# Altium PCB HU_MAIN_PCB_revA.PcbDoc (part 3 of 3)
Units mm, origin at the board's own origin, x right, y up, seen from the top; angles counter-clockwise.
Board outline 136.5 x 85 mm, 4 copper layers (Top Layer, Layer 1, Layer 2, Bottom Layer), stack 1.586 mm thick; 169 components, 126 nets, 634 pads, 1057 vias.
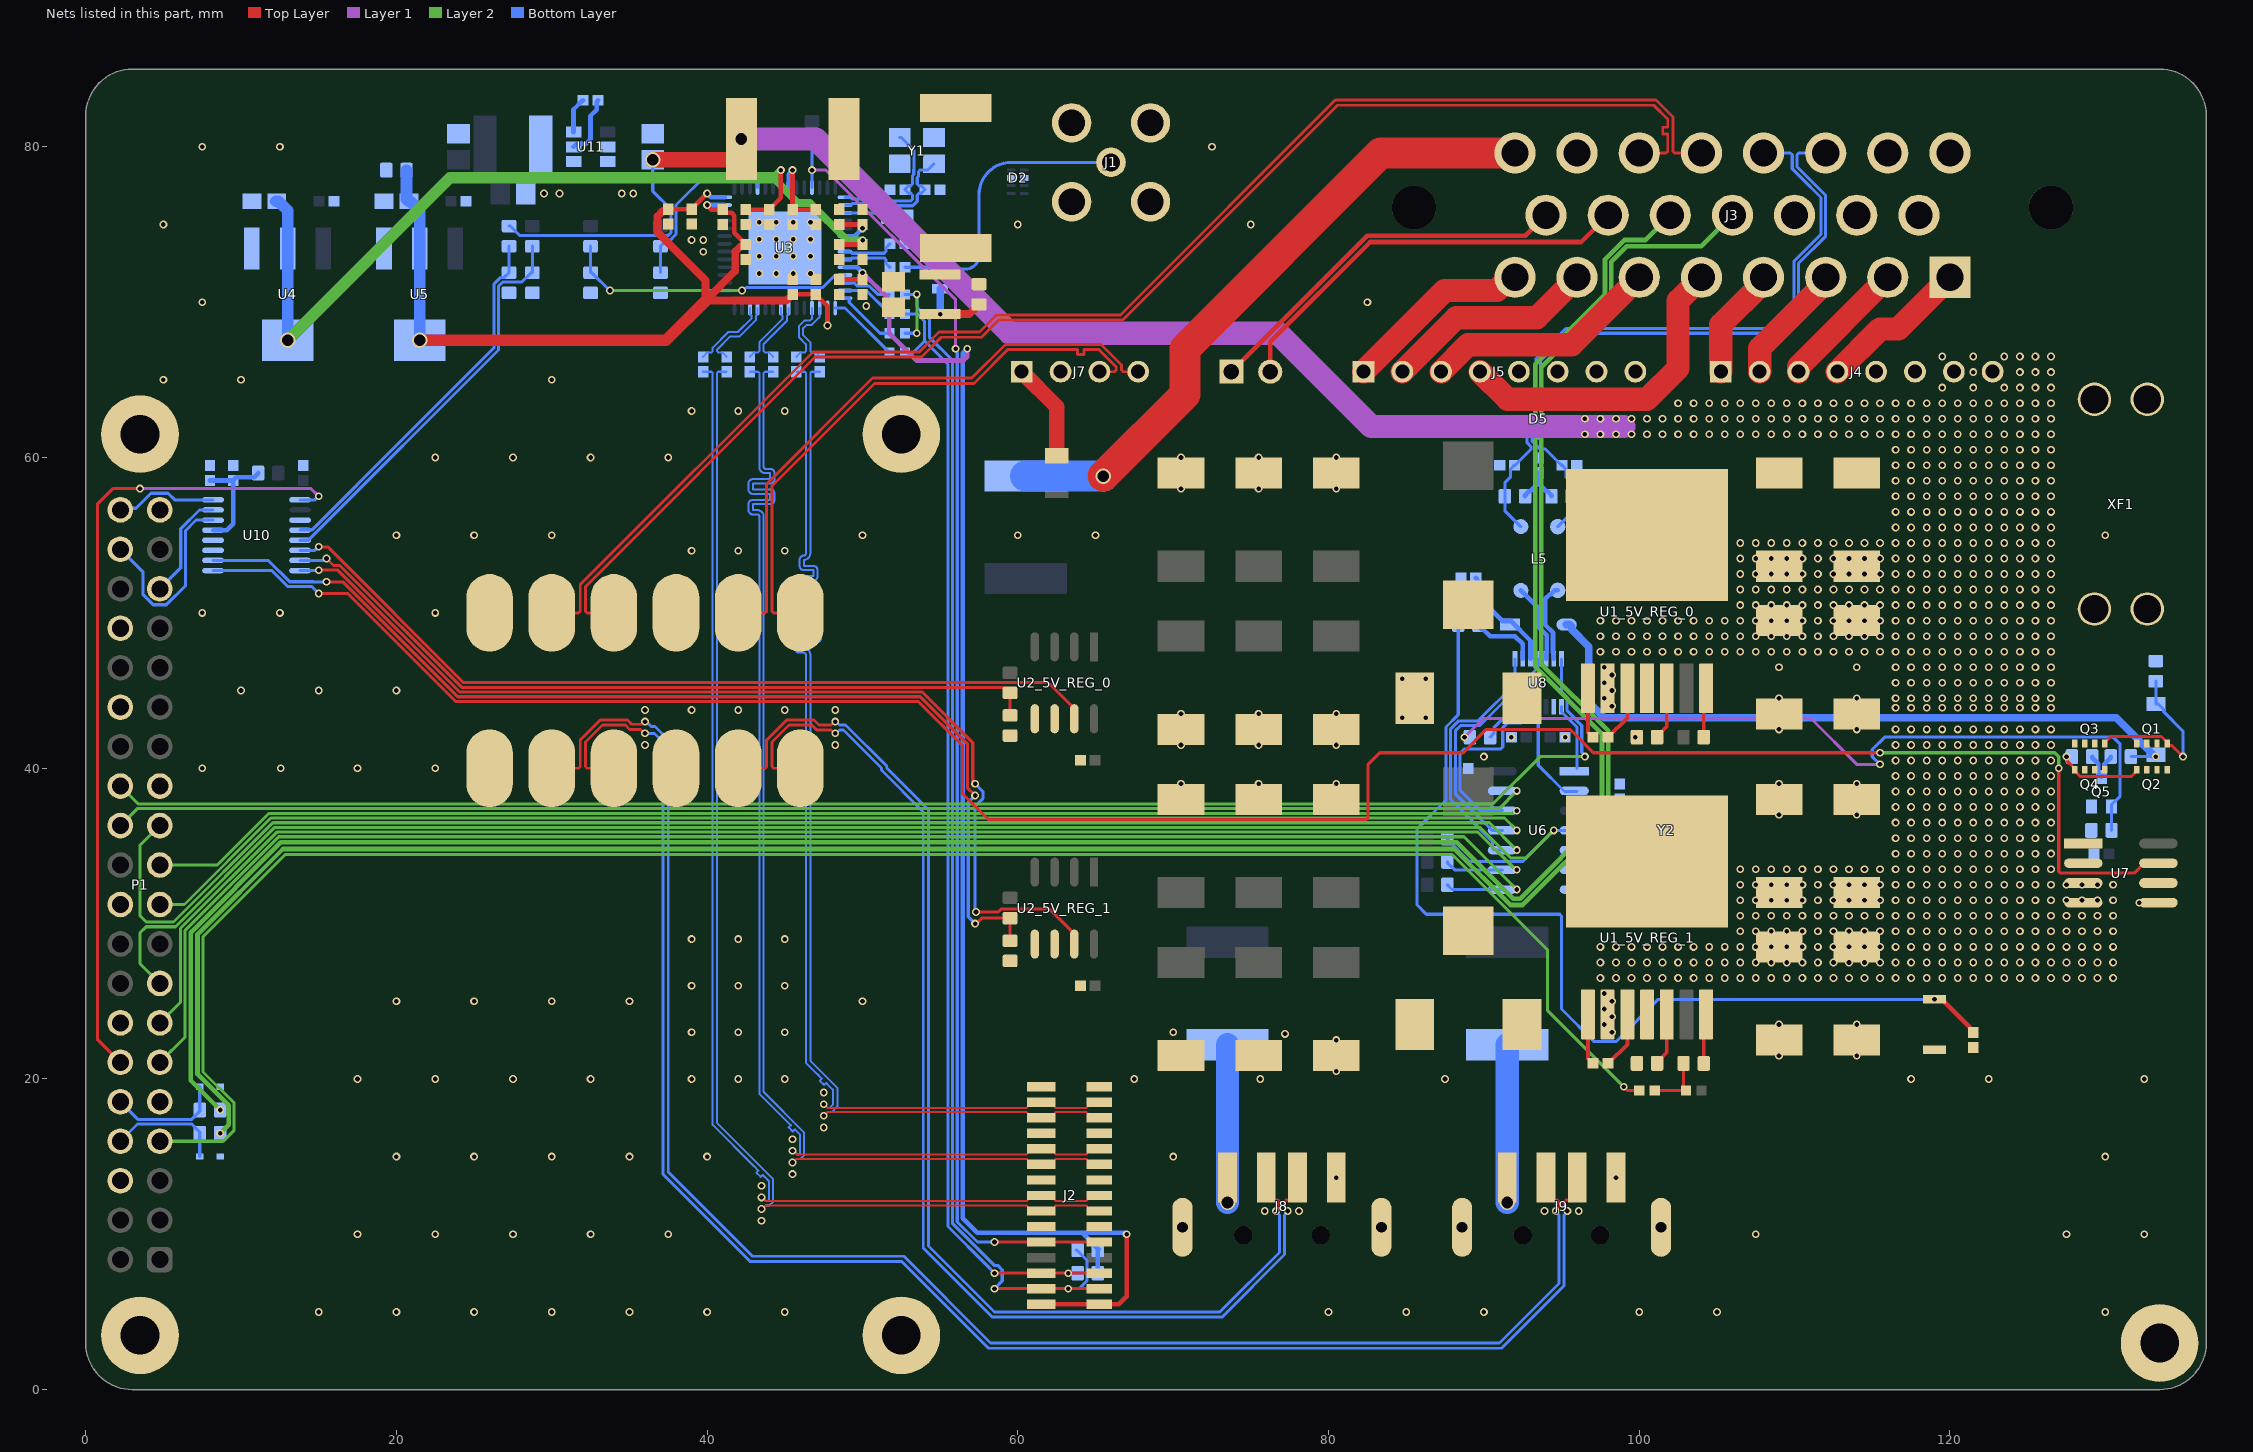
[diagram p4: the nets of this part, all layers, seen from the top]

## Via types
v1: diameter 0.5, hole 0.3, Top Layer to Bottom Layer, tented both sides, 1048 vias
v2: diameter 1, hole 0.75, Top Layer to Bottom Layer, tented both sides, 8 vias
v3: diameter 0.5, hole 0.3, Top Layer to Bottom Layer, 1 vias

## Nets (pads, with @x,y where several pads share a name; then routed paths per layer and width w, separated by ;. In a path a pad name is that pad's centre, name@x,y a point inside that pad or via, vN(x,y) a via of type N, cw(c..) or ccw(c..) an arc to the next point about the centre after c; other vN are vias at no path point) (continued)
5VB_LL_EN: P1.7 R38.2 | length 121.6
  Top Layer w0.2: v1(99,19.5) 99.017,19.5 99.267,19.25 R38.2@100,19.25
  Layer 2 w0.2: P1.7@4.77,15.99 8.847,15.99 9.552,16.694 9.552,18.448 7.552,20.448 7.552,29.154 12.846,34.448 87.954,34.448 94.1,28.303 94.1,24.4 v1(99,19.5)
ADC_MISO: P1.35 U10.15 | length 7
  Bottom Layer w0.2: P1.35@4.77,51.55 6.119,52.899 6.119,55.419 7.325,56.625 U10.15@8.2,56.625
ADC_MOSI: P1.38 U10.14 | length 12.6
  Bottom Layer w0.2: P1.38@2.23,54.09 3.7,52.62 3.7,51.168 4.345,50.523 5.195,50.523 6.421,51.749 6.421,55.294 7.102,55.975 U10.14@8.2,55.975
ADC_nCS: P1.12 U10.1 | length 52.7
  Top Layer w0.2: P1.12@2.23,21.07 0.752,22.548 0.752,57.002 1.75,58 v1(3.5,58)
  Layer 1 w0.2: v1(3.5,58) 14.5,58 v1(15,57.5)
  Bottom Layer w0.2: U10.1@13.8,57.275 14.744,57.275 14.969,57.5 v1(15,57.5)
ADC_SCLK: P1.40 U10.16 | length 6.6
  Bottom Layer w0.2: P1.40@2.23,56.63 2.338,56.738 3.238,56.738 4.2,57.7 5.3,57.7 5.725,57.275 U10.16@8.2,57.275
AUX_USB_D_N: J3.20 pad.31@30,50 | length 91.4
  Top Layer w0.184: pad.31@30,50 31.725,50 31.833,50.108 31.833,51.817 46.816,66.8 53.653,66.8 54.928,68.075 57.528,68.075 58.628,69.175 66.603,69.175 80.437,83.009 101.071,83.009 102.167,81.913 102.167,79.708 102.275,79.6 J3.20@104,79.6
AUX_USB_D_P: J3.21 pad.31@34,50 | length 90.9
  Top Layer w0.184: pad.31@34,50 32.275,50 32.167,50.108 32.167,51.678 46.955,66.466 53.791,66.466 55.066,67.741 57.666,67.741 58.766,68.841 66.741,68.841 80.575,82.675 100.933,82.675 101.816,81.792 101.833,81.775 101.833,81.262 101.512,81.262 101.512,80.824 101.833,80.824 101.833,79.8 101.833,79.708 101.725,79.6 J3.21@100,79.6
CAM_1V2: C24.1 C29.2 C30.2 C31.2 C32.2 C39.2 C40.2 R19.1 U3.30 U3.55 U3.56 U5.2 U5.4 | length 63.5
  Top Layer w0.3: C31.2@37.5,75.979 C32.2@39,75.979 39,76 v1(40,77) ; v1@40,76.229 40.271,75.957 C30.2@41,75.957 41,75.936 41.186,75.749 41.574,75.749 41.75,75.574 41.75,74.479 42.5,73.729 C29.2@42.5,73.707 ; C39.2@45.5,70.5 C40.2@47,70.5 47,70.479 47.75,69.729 v1@47.75,68.479
  Top Layer w0.5: C31.2@37.5,75.979 37.5,75.957 37.414,75.871 37.158,75.871 36.812,75.525 36.812,74.488 39.9,71.4 39.9,70.1 ; C29.2@42.5,73.707 42.5,73.686 42.414,73.599 42.158,73.599 41.812,73.253 41.812,72.012 39.9,70.1 ; C39.2@45.5,70.5 45.5,70.479 45.414,70.392 45.392,70.392 45.1,70.1 39.9,70.1
  Top Layer w0.75: v2(21.5,67.55) 37.35,67.55 39.9,70.1
  Bottom Layer w0.3: v1(40,76.25) U3.55@41.125,76.25 ; v1(40,77) 40.018,77 40.268,76.75 U3.56@41.125,76.75 ; v1(47.75,68.5) U3.30@47.75,69.625
  Bottom Layer w0.75: R19.1@20.65,78.5 20.65,76.631 20.781,76.5 C24.1@20.802,76.5 20.9,76.5 21.5,75.9 U5.2@21.5,73.45 v2(21.5,67.55)
CAM_1V8: C22.1 C33.2 C34.2 C35.2 C36.2 U3.7 U3.21 U4.2 U4.4 | length 61.3
  Top Layer w0.3: C33.2@42.5,75.957 C34.2@44,75.957 44,75.979 44.186,76.165 44.208,76.165 44.75,76.707 v1@44.75,78.479 ; C35.2@48.5,73.707 C36.2@50,73.707
  Layer 2 w0.5: v1(44.75,78.5) 44.25,78 45.875,76.375 46.625,76.375 49.014,73.986 v1(50.014,73.986)
  Layer 2 w0.75: v2(13,67.55) 23.45,78 26.333,78 26.335,78.002 27.165,78.002 27.167,78 44.25,78
  Bottom Layer w0.3: U3.7@44.75,77.375 v1(44.75,78.5) ; U3.21@48.875,73.75 49.746,73.75 49.982,73.986 v1(50.014,73.986)
  Bottom Layer w0.75: C22.1@12.25,76.5 12.4,76.5 13,75.9 U4.2@13,73.45 v2(13,67.55)
CAM_I2C_SCL: J2.13 R7.1 R11.1 R12.1 | length 72.9
  Top Layer w0.2: v1(58.5,7.5) J2.13@61.5,7.5 J2.13@65.25,7.5
  Bottom Layer w0.2: R12.1@52.75,66.75 52.758,66.758 53.258,66.758 54,67.5 ; R11.1@52.75,69.25 53.508,69.25 54,68.758 54,67.5 ; v1(58.5,7.5) 58,8 55.5,10.5 55.5,66 54,67.5
  other v1: 63.25,7.5
CAM_I2C_SDA: J2.14 R6.1 R8.1 R9.1 | length 81.1
  Top Layer w0.2: v1(58.5,6.5) J2.14@61.5,6.5 J2.14@65.25,6.5
  Layer 2 w0.2: v1(53.5,68) v1(53.5,70.5)
  Bottom Layer w0.2: R9.1@52.75,68 v1(53.5,68) ; R8.1@52.75,70.5 v1(53.5,70.5) 53.5,69.684 54.302,68.883 54.302,67.75 55.802,66.25 55.802,10.672 58.473,8 58.707,8 59,7.707 59,7 v1(58.5,6.5) ; v1(63.25,6.5) 63.952,6.5 64.452,7 64.452,8.323 63.775,9 R6.1@63.75,9
CAM_nPWDN: J2.11 R13.1 U3.11 | length 84.8
  Top Layer w0.2: v1(58.5,9.5) J2.11@61.5,9.5 J2.11@65.25,9.5
  Layer 1 w0.2: v1(46.75,78.5) 47.654,78.5 56,70.154 56,67.011 v1(55.994,67.004)
  Bottom Layer w0.2: U3.11@46.75,77.375 R13.1@46.75,80.35 ; v1(55.994,67.004) 56.051,66.947 56.051,66.789 56.103,66.737 56.103,10.797 57.4,9.5 v1(58.5,9.5)
CAN_INH: R28.1 U8.7 | length 2.8
  Bottom Layer w0.2: R28.1@90.4,42 90.642,42.242 90.642,42.599 91.667,43.624 91.947,43.624 92,43.677 U8.7@92,43.957
CAN_MISO: P1.21 U6.12 U8.6 | length 101
  Layer 2 w0.2: P1.21@4.77,33.77 8.47,33.77 11.797,37.097 91.867,37.097 92.04,37.27 v1(92.121,37.27)
  Bottom Layer w0.2: U6.12@91.184,37.27 89.772,37.27 88.462,38.58 88.462,40.962 88.75,41.25 91.095,41.25 91.212,41.367 91.212,42.612 91.502,42.902 92.383,42.902 92.5,43.019 U8.6@92.5,43.957
CAN_MOSI: P1.19 U6.11 U8.11 | length 105.6
  Layer 2 w0.2: P1.19@4.77,31.23 6.357,31.23 11.922,36.795 91.326,36.795 v1(92.121,36)
  Bottom Layer w0.2: U6.11@91.184,36 90.518,36 88.161,38.357 88.161,42.408 88.503,42.75 89.75,42.75 93.448,46.448 93.448,46.991 U8.11@93.5,47.043
CAN_N: C49.1 D5.1 J3.19 L5.4 R33.2 | length 44
  Bottom Layer w0.2: L5.4@92.375,55.55 91.35,56.575 R33.2@91.35,57.5 91.35,58.384 91.721,58.755 91.721,59.264 91.957,59.5 C49.1@91.979,59.5 92,59.5 93.031,60.531 93.031,60.697 92.787,60.942 92.787,62.058 93.349,62.621 93.349,63.239 93.232,63.356 92.96,63.356 92.85,63.466 D5.1@92.85,63.5 92.85,63.64 92.96,63.75 93.232,63.75 93.349,63.867 93.349,66.375 95.276,68.302 108.302,68.302 109.948,69.948 109.948,72.625 110.037,72.713 110.348,73.025 111.698,74.375 111.698,76.742 110.437,78.004 109.849,78.591 109.849,79.483 109.732,79.6 J3.19@108,79.6
CAN_nCS: P1.26 U8.14 | length 102.9
  Layer 2 w0.2: P1.26@2.23,38.85 3.38,37.7 90.574,37.7 93.624,40.75 v1(96.5,40.75)
  Bottom Layer w0.2: U8.14@95,47.043 95,44.883 95.354,44.529 95.354,43.693 96.302,42.746 96.302,41.017 96.5,40.819 v1(96.5,40.75)
CAN_P: C51.2 D5.2 J3.18 L5.1 R34.1 | length 44.5
  Bottom Layer w0.2: L5.1@94.75,55.55 95.65,56.45 R34.1@95.65,57.5 95.65,58.384 95.279,58.755 95.279,59.264 95.043,59.5 C51.2@95.021,59.5 95,59.5 93.962,60.538 93.617,60.538 93.088,61.066 93.088,61.934 93.651,62.496 93.651,63.239 93.768,63.356 94.04,63.356 94.15,63.466 D5.2@94.15,63.5 94.15,63.64 94.04,63.75 93.768,63.75 93.651,63.867 93.651,66.25 95.401,68 108.427,68 110.25,69.823 110.25,72.5 112,74.25 112,76.867 110.151,78.716 110.151,79.483 110.268,79.6 J3.18@112,79.6
CAN_RX: U6.2 U8.4 | length 7
  Bottom Layer w0.2: U8.4@93.5,43.957 93.5,40.19 95.19,38.5 U6.2@96,38.5
CAN_SCLK: P1.23 U6.10 U8.8 | length 114.9
  Layer 2 w0.2: P1.23@4.77,36.31 3.5,35.04 3.5,30.5 3.9,30.1 5.653,30.1 12.047,36.494 90.357,36.494 v1(92.121,34.73)
  Bottom Layer w0.2: U6.10@91.184,34.73 90.706,34.73 90.548,34.888 90.548,35.301 87.859,37.991 87.859,42.532 88.378,43.052 89.625,43.052 92,45.426 U8.8@92,47.043
CAN_TX: U6.1 U8.1 | length 4.4
  Bottom Layer w0.2: U8.1@95,43.957 95,43.62 96,42.621 U6.1@96,40
CFG0: R16.1 R18.2 U3.4 | length 11.8
  Bottom Layer w0.2: R18.2@37,71.9 R16.1@37,73.6 37.3,73.9 37.528,73.9 38,74.372 38,76.25 40,78.25 43.133,78.25 43.25,78.133 U3.4@43.25,77.375
CFG1: R15.1 R17.2 U3.25 | length 19
  Layer 2 w0.2: v1(33.75,70.75) v1(42.25,70.75)
  Bottom Layer w0.2: R15.1@32.5,73.6 R17.2@32.5,71.9 32.575,71.9 33.725,70.75 v1(33.75,70.75) ; v1(42.25,70.75) 42.319,70.75 42.517,70.948 47.448,70.948 48.234,71.734 48.473,71.734 48.48,71.74 48.865,71.74 U3.25@48.875,71.75
CKA_N: C16.1 U3.40 | length 5
  Bottom Layer w0.13: C16.1@39.75,66.479 39.75,66.5 40.021,66.771 40.284,66.771 40.36,66.847 40.36,67.071 41.367,68.078 41.983,68.078 42.86,68.955 42.86,69.139 42.75,69.249 U3.40@42.75,69.625
CKA_P: C15.1 U3.39 | length 5
  Bottom Layer w0.13: C15.1@41.25,66.479 41.25,66.5 40.979,66.771 40.716,66.771 40.64,66.847 40.64,66.955 41.483,67.798 42.099,67.798 43.14,68.839 43.14,69.139 43.25,69.249 U3.39@43.25,69.625
CSI_CLK_N: C16.2 J2.8 | length 78.7
  Top Layer w0.13: v1(43.5,12.375) 43.526,12.375 43.761,12.14 60.564,12.14 60.64,12.216 60.64,12.265 60.875,12.5 J2.8@61.5,12.5 62.125,12.5 62.36,12.265 62.36,12.216 62.436,12.14 64.414,12.14 64.49,12.216 64.49,12.265 64.725,12.5 J2.8@65.25,12.5
  Bottom Layer w0.13: C16.2@39.75,65.521 40.284,65.521 40.36,65.445 40.36,17.04 42.984,14.416 43.03,14.37 43.301,14.099 43.17,13.968 43.442,13.696 43.573,13.827 43.654,13.746 43.7,13.7 43.97,13.43 43.97,12.216 43.894,12.14 43.787,12.14 43.552,12.375 v1(43.5,12.375)
CSI_CLK_P: C15.2 J2.9 | length 78.8
  Top Layer w0.13: v1(43.5,11.625) 43.526,11.625 43.761,11.86 60.564,11.86 60.64,11.784 60.64,11.735 60.875,11.5 J2.9@61.5,11.5 62.125,11.5 62.36,11.735 62.36,11.784 62.436,11.86 64.414,11.86 64.49,11.784 64.49,11.735 64.725,11.5 J2.9@65.25,11.5
  Bottom Layer w0.13: C15.2@41.25,65.521 40.716,65.521 40.64,65.445 40.64,17.156 44.25,13.546 44.25,12.1 44.01,11.86 43.761,11.86 43.526,11.625 v1(43.5,11.625)
CSI_D0_N: C12.2 J2.2 | length 78.2
  Top Layer w0.13: v1(47.5,18.375) 47.526,18.375 47.761,18.14 60.564,18.14 60.64,18.216 60.64,18.265 60.875,18.5 J2.2@61.5,18.5 62.125,18.5 62.36,18.265 62.36,18.216 62.436,18.14 64.414,18.14 64.49,18.216 64.49,18.265 64.725,18.5 J2.2@65.25,18.5
  Bottom Layer w0.13: C12.2@45.75,65.521 46.284,65.521 46.36,65.445 46.36,54.548 46.36,53.821 cw(c46.23,53.821) 46.23,53.691 ccw(c46.23,53.411) 45.95,53.411 45.95,53.027 ccw(c46.23,53.027) 46.23,52.747 46.834,52.747 46.834,52.363 45.94,52.363 ccw(c45.94,52.083) 45.66,52.083 45.66,51.699 ccw(c45.94,51.699) 45.94,51.419 47.06,51.419 47.06,51.035 45.94,51.035 ccw(c45.94,50.755) 45.66,50.755 45.66,50.371 ccw(c45.94,50.371) 45.94,50.091 47.06,50.091 47.06,49.707 45.94,49.707 ccw(c45.94,49.427) 45.66,49.427 45.66,49.043 ccw(c45.94,49.043) 45.94,48.763 47.06,48.763 47.06,48.379 45.94,48.379 ccw(c45.94,48.099) 45.66,48.099 45.66,47.715 ccw(c45.94,47.715) 45.94,47.435 46.23,47.435 cw(c46.23,47.305) 46.36,47.305 46.36,47.1 46.36,21.044 47.102,20.302 47.148,20.256 47.385,20.02 47.253,19.888 47.525,19.617 47.656,19.748 47.702,19.702 48.1,19.304 48.1,18.346 47.894,18.14 47.761,18.14 47.526,18.375 v1(47.5,18.375)
CSI_D0_P: C11.2 J2.3 | length 78.3
  Top Layer w0.13: v1(47.5,17.625) 47.526,17.625 47.761,17.86 60.564,17.86 60.64,17.784 60.64,17.735 60.875,17.5 J2.3@61.5,17.5 62.125,17.5 62.36,17.735 62.36,17.784 62.436,17.86 64.414,17.86 64.49,17.784 64.49,17.735 64.725,17.5 J2.3@65.25,17.5
  Bottom Layer w0.13: C11.2@47.25,65.521 46.716,65.521 46.64,65.445 46.64,54.548 46.64,53.821 cw(c46.23,53.821) 46.23,53.411 46.23,53.027 46.834,53.027 cw(c46.834,52.747) 47.114,52.747 47.114,52.363 cw(c46.834,52.363) 46.834,52.083 45.94,52.083 45.94,51.699 47.06,51.699 cw(c47.06,51.419) 47.34,51.419 47.34,51.035 cw(c47.06,51.035) 47.06,50.755 45.94,50.755 45.94,50.371 47.06,50.371 cw(c47.06,50.091) 47.34,50.091 47.34,49.707 cw(c47.06,49.707) 47.06,49.427 45.94,49.427 45.94,49.043 47.06,49.043 cw(c47.06,48.763) 47.34,48.763 47.34,48.379 cw(c47.06,48.379) 47.06,48.099 45.94,48.099 45.94,47.715 46.23,47.715 cw(c46.23,47.305) 46.64,47.305 46.64,47.1 46.64,21.16 48.38,19.42 48.38,18.23 48.01,17.86 47.761,17.86 47.526,17.625 v1(47.5,17.625)
CSI_D1_N: C14.2 J2.5 | length 78.2
  Top Layer w0.13: v1(45.5,15.375) 45.526,15.375 45.761,15.14 60.564,15.14 60.64,15.216 60.64,15.265 60.875,15.5 J2.5@61.5,15.5 62.125,15.5 62.36,15.265 62.36,15.216 62.436,15.14 64.414,15.14 64.49,15.216 64.49,15.265 64.725,15.5 J2.5@65.25,15.5
  Bottom Layer w0.13: C14.2@42.75,65.521 43.284,65.521 43.36,65.445 43.36,60.498 43.36,59.401 ccw(c43.77,59.401) 43.77,58.991 44.06,58.991 44.06,58.607 42.94,58.607 ccw(c42.94,58.327) 42.66,58.327 42.66,57.943 ccw(c42.94,57.943) 42.94,57.663 44.06,57.663 44.06,57.279 42.94,57.279 ccw(c42.94,56.999) 42.66,56.999 42.66,56.615 ccw(c42.94,56.615) 42.94,56.335 43.23,56.335 cw(c43.23,56.205) 43.36,56.205 43.36,56 43.36,19.044 45.152,17.252 45.198,17.206 45.385,17.02 45.253,16.888 45.525,16.617 45.656,16.748 45.702,16.702 45.97,16.434 45.97,15.216 45.894,15.14 45.787,15.14 45.552,15.375 v1(45.5,15.375)
CSI_D1_P: C13.2 J2.6 | length 78.3
  Top Layer w0.13: v1(45.5,14.625) 45.526,14.625 45.761,14.86 60.564,14.86 60.64,14.784 60.64,14.735 60.875,14.5 J2.6@61.5,14.5 62.125,14.5 62.36,14.735 62.36,14.784 62.436,14.86 64.414,14.86 64.49,14.784 64.49,14.735 64.725,14.5 J2.6@65.25,14.5
  Bottom Layer w0.13: C13.2@44.25,65.521 43.716,65.521 43.64,65.445 43.64,60.498 43.64,59.401 ccw(c43.77,59.401) 43.77,59.271 44.06,59.271 cw(c44.06,58.991) 44.34,58.991 44.34,58.607 cw(c44.06,58.607) 44.06,58.327 42.94,58.327 42.94,57.943 44.06,57.943 cw(c44.06,57.663) 44.34,57.663 44.34,57.279 cw(c44.06,57.279) 44.06,56.999 42.94,56.999 42.94,56.615 43.23,56.615 cw(c43.23,56.205) 43.64,56.205 43.64,56 43.64,19.16 46.25,16.55 46.25,15.1 46.01,14.86 45.761,14.86 45.526,14.625 v1(45.5,14.625)
DA0_N: C12.1 U3.32 | length 4.3
  Bottom Layer w0.13: C12.1@45.75,66.479 45.75,66.5 46.021,66.771 46.284,66.771 46.36,66.847 46.36,67.071 46.36,67.3 45.9,67.76 45.9,68.44 46.284,68.824 46.628,68.824 46.75,68.946 U3.32@46.75,69.625
DA0_P: C11.1 U3.31 | length 4.4
  Bottom Layer w0.13: C11.1@47.25,66.479 47.25,66.5 46.979,66.771 46.716,66.771 46.64,66.847 46.64,66.955 46.64,67.416 46.18,67.876 46.18,68.324 46.4,68.544 46.744,68.544 47.227,69.027 47.227,69.602 U3.31@47.25,69.625
DA1_N: C14.1 U3.36 | length 4.2
  Bottom Layer w0.13: C14.1@42.75,66.479 42.75,66.5 43.021,66.771 43.284,66.771 43.36,66.847 43.36,67.424 44.86,68.924 44.86,69.139 44.75,69.249 U3.36@44.75,69.625
DA1_P: C13.1 U3.35 | length 4.2
  Bottom Layer w0.13: C13.1@44.25,66.479 44.25,66.5 43.979,66.771 43.716,66.771 43.64,66.847 43.64,67.308 45.14,68.808 45.14,69.139 45.25,69.249 U3.35@45.25,69.625
DAC_USB_D_N: J7.4 pad.31@42,50 | length 38.6
  Top Layer w0.184: pad.31@42,50 43.725,50 43.833,50.108 43.833,58.305 50.637,65.109 57.037,65.109 59.212,67.284 65.343,67.284 66.667,65.96 66.667,65.633 66.775,65.525 J7.4@67.75,65.525
DAC_USB_D_P: J7.3 pad.31@46,50 | length 38.2
  Top Layer w0.184: pad.31@46,50 44.275,50 44.167,50.108 44.167,58.167 50.775,64.775 57.175,64.775 59.35,66.95 63.3,66.95 63.83,66.95 63.83,66.629 64.268,66.629 64.268,66.95 64.8,66.95 65.205,66.95 66.333,65.822 66.333,65.633 66.225,65.525 J7.3@65.25,65.525
EXT_USB_5V: F2.1 J3.23 | length 41.8
  Top Layer w2: v2(65.5,58.8) 70.75,64.05 70.75,67 83.35,79.6 J3.23@92,79.6
  Bottom Layer w2: F2.1@60.5,58.8 v2(65.5,58.8)
FL+: J3.1 J4.4 | length 9.8
  Top Layer w1.5: J4.4@112.75,65.525 115.5,68.275 116.675,68.275 J3.1@120,71.6
FL-: J3.2 J4.3 | length 8.5
  Top Layer w1.5: J4.3@110.25,65.525 110.25,65.85 J3.2@116,71.6
FR+: J3.3 J4.2 | length 7.8
  Top Layer w1.5: J4.2@107.75,65.525 107.75,67.039 112,71.289 J3.3@112,71.6
FR-: J3.4 J4.1 | length 7.2
  Top Layer w1.5: J4.1@105.25,65.525 105.25,68.539 108,71.289 J3.4@108,71.6
GND: C2_5V_REG_0.1 C2_5V_REG_1.1 C3_5V_REG_0.1 C3_5V_REG_1.1 C4_5V_REG_0.1 C4_5V_REG_1.1 C5_5V_REG_0.1 C5_5V_REG_1.1 C6_5V_REG_0.1 C6_5V_REG_1.1 C7_5V_REG_0.1 C7_5V_REG_1.1 C8_5V_REG_0.1 C8_5V_REG_1.1 C9_5V_REG_0.1 C9_5V_REG_1.1 C10_5V_REG_0.1 C10_5V_REG_1.1 C19.1 C20.1 C21.1 C22.2 C23.1 C24.2 C25.1 C26.1 C27.1 C28.1 C29.1 C30.1 C31.1 C32.1 C33.1 C34.1 C35.1 C36.1 C37.1 C38.1 C39.1 C40.1 C41.2 C42.2 C43.2 C44.2 C45.2 C46.2 C47.2 C48.2 C49.2 C50.2 C51.1 C54.1 C55.2 C56.2 C57.2 C59.1 C60.1 C61.1 C62_5V_REG_0.1 C62_5V_REG_1.1 C63_5V_REG_0.1 C63_5V_REG_1.1 D1_5V_REG_0.2 D1_5V_REG_1.2 D2.3 D2.8 D5.3 D6.2 D7.2 J1.2 J2.1 J2.4 J2.7 J2.10 J3.9 J3.10 J3.11 J3.22 J4.5 J4.6 J5.5 J5.6 J7.2 J8.4 J8.Shell J9.4 J9.Shell P1.6 P1.9 P1.14 P1.20 P1.25 P1.30 P1.34 P1.39 pad.29 pad.30 Q5.2 R3_5V_REG_0.2 R3_5V_REG_1.2 R5_5V_REG_0.1 R5_5V_REG_1.1 R10.1 R14.1 R17.1 R18.1 R19.2 R25.1 R29.1 R30.1 R37.1 SW1.1 U1_5V_REG_0.4 U1_5V_REG_0.8 U1_5V_REG_1.4 U1_5V_REG_1.8 U2_5V_REG_0.5 U2_5V_REG_1.5 U3.57 U4.1 U5.1 U6.7 U7.5 U8.2 U10.3 U10.12 U11.4 Y1.2 Y1.4 Y2.2 Y2.4
  other v1: 15,5 20,5 25,5 30,5 35,5 40,5 45,5 80,5 85,5 90,5 100,5 105,5 130,5 17.5,10 22.5,10 27.5,10 32.5,10 37.5,10 107.5,10 127.5,10 132.5,10 43.5,10.875 75.9,11.5 78.1,11.5 93.9,11.5 96.1,11.5 43.5,13.125 80.5,13.65 98.5,13.65 45.5,13.875 20,15 25,15 30,15 35,15 40,15 70,15 130,15 45.5,16.125 47.5,16.875 47.5,19.125 17.5,20 22.5,20 27.5,20 32.5,20 39,20 42,20 45,20 67.5,20 75.6,20 87.5,20 117.5,20 122.5,20 132.5,20 80.5,20.5 109,21.5 114,21.5 80.5,22.5 77.2,22.9 39,23 42,23 45,23 70,23 109,23.5 114,23.5 20,25 25,25 30,25 35,25 50,25 39,26 42,26 45,26 39,29 42,29 45,29 132.179,31.345 109,37 114,37 70.5,39 75.5,39 80.5,39 109,39 114,39 7.5,40 12.55,40 17.5,40 22.5,40 90,40.75 36,41.5 48.25,41.5 70.5,41.5 75.5,41.5 80.5,41.5 91.771,42 95.229,42 99.75,42 109,42.5 114,42.5 84.75,43.25 86.25,43.25 70.5,43.5 75.5,43.5 80.5,43.5 36,43.75 39,43.75 42,43.75 45,43.75 48.25,43.75 109,44.5 114,44.5 10,45 15,45 20,45 84.75,45.75 86.25,45.75 109,46.5 114,46.5 7.5,50 12.5,50 22.5,50 39,54 42,54 45,54 20,55 25,55 30,55 50,55 60,55 65,55 130,55 70.5,58 75.5,58 80.5,58 22.5,60 27.5,60 32.5,60 37.5,60 70.5,60 75.5,60 80.5,60 39,63 42,63 45,63 5,65 10,65 30,65 50.25,69.75 7.5,70 82.5,70 43.35,71.85 44.45,71.85 45.55,71.85 46.65,71.85 43.35,72.95 44.45,72.95 45.55,72.95 46.65,72.95 39.75,73.25 39,74 39.75,74 43.35,74.05 44.45,74.05 45.55,74.05 46.65,74.05 5,75 60,75 75,75 43.35,75.15 44.45,75.15 45.55,75.15 46.65,75.15 29.5,77 30.5,77 34.5,77 35.25,77 7.5,80 12.5,80 72.5,80
GPS_RX: J3.13 R40.2 | length 154.1
  Layer 2 w0.3: v1(8.65,18) 6.752,19.898 6.752,29.422 12.567,35.237 88.263,35.237 91.898,31.602 92.334,31.602 97.598,36.866 97.598,42.234 93.298,46.534 93.298,65.998 97.8,70.5 97.8,72.768 99.032,74 100.4,74 J3.13@102,75.6
GPS_TX: J3.12 R39.2 | length 159.3
  Layer 2 w0.3: v1(8.65,16.5) 9.2,17.05 9.2,18.3 7.2,20.3 7.2,29.3 12.7,34.8 88.1,34.8 91.7,31.2 92.5,31.2 98,36.7 98,42.4 93.7,46.7 93.7,65.821 98.202,70.322 98.202,72.602 99.198,73.598 103.998,73.598 J3.12@106,75.6
MCP2518_nCS: P1.24 U6.13 | length 90.8
  Layer 2 w0.2: P1.24@2.23,36.31 3.318,37.398 90.979,37.398 v1(92.121,38.54)
MCP2518_nINT: P1.15 R21.2 U6.4 | length 108.8
  Layer 2 w0.2: P1.15@4.77,26.15 3.5,27.42 3.5,29.4 3.898,29.798 5.778,29.798 12.172,36.192 89.75,36.192 91.712,34.23 92.73,34.23 v1(94.5,36)
  Bottom Layer w0.2: R21.2@87.65,35.5 87.65,35.425 89.075,34 92.5,34 v1(94.5,36) U6.4@95.816,36
MCP2518_nINT0: P1.13 R22.2 U6.9 | length 100
  Layer 2 w0.2: P1.13@4.77,23.61 6.098,24.938 6.098,29.692 12.297,35.89 89.625,35.89 92.055,33.46 v1(92.121,33.46)
  Bottom Layer w0.2: R22.2@87.65,34 87.65,33.925 88.115,33.46 U6.9@91.184,33.46
MCP2518_nINT1: P1.11 R23.2 U6.8 | length 102.5
  Layer 2 w0.2: P1.11@4.77,21.07 6.4,22.7 6.4,29.567 12.421,35.589 88.722,35.589 v1(92.121,32.19)
  Bottom Layer w0.2: R23.2@87.65,32.5 87.65,32.49 87.95,32.19 U6.8@91.184,32.19
MIC+: J3.15 J6.1 | length 24.4
  Top Layer w0.3: J6.1@73.75,65.525 82.5,74.275 92.675,74.275 J3.15@94,75.6
MIC-: J3.14 J6.2 | length 27.1
  Top Layer w0.3: J6.2@76.25,65.525 76.25,67.45 82.673,73.873 96.273,73.873 J3.14@98,75.6
NetC1_5V_REG_0_1: C1_5V_REG_0.1 U1_5V_REG_0.3 | length 3.7
  Top Layer w0.254: C1_5V_REG_0.1@97.979,42 98,42 99.23,43.23 U1_5V_REG_0.3@99.23,45.15
NetC1_5V_REG_0_2: C1_5V_REG_0.2 D1_5V_REG_0.1 L1_5V_REG_0.1 U1_5V_REG_0.1 | length 3.3
  Top Layer w0.254: U1_5V_REG_0.1@96.69,45.15 96.69,42.31 97,42 C1_5V_REG_0.2@97.021,42
NetC1_5V_REG_1_1: C1_5V_REG_1.1 U1_5V_REG_1.3 | length 3.7
  Top Layer w0.254: C1_5V_REG_1.1@97.979,21 98,21 99.23,22.23 U1_5V_REG_1.3@99.23,24.15
NetC1_5V_REG_1_2: C1_5V_REG_1.2 D1_5V_REG_1.1 L1_5V_REG_1.1 U1_5V_REG_1.1 | length 3.3
  Top Layer w0.254: U1_5V_REG_1.1@96.69,24.15 96.69,21.31 97,21 C1_5V_REG_1.2@97.021,21
NetC18_2: C18.2 R14.2 | length 1.6
  Bottom Layer w0.2: C18.2@52.729,73.75 R14.2@54.35,73.75
NetC25_2: C25.2 C26.2 U3.8 | length 5.2
  Top Layer w0.3: v1@45.5,78.479 C26.2@45.5,75.957 C25.2@47,75.957
  Bottom Layer w0.3: U3.8@45.25,77.375 45.25,78.232 45.5,78.482 v1(45.5,78.5)
NetC27_2: C27.2 C28.2 U3.20 | length 2.8
  Top Layer w0.3: C27.2@48.5,75 C28.2@50,75
  Bottom Layer w0.3: U3.20@48.875,74.25 49.5,74.25 v1(50,74.75)
NetC41_1: C41.1 L2.2 L3.1 R20.2
NetC48_1: C48.1 D4.1 R31.2 U8.10 | length 7.2
  Bottom Layer w0.3: C48.1@89.479,52.25 89.564,52.164 89.564,50.836 R31.2@89.65,50.75 89.65,50.7 89.9,50.45 90.202,50.45 91.171,49.481 91.717,49.481 93,48.198 U8.10@93,47.043
NetC50_1: C50.1 R31.1 R32.2 SW1.2 | length 65.7
  Top Layer w0.3: v1(119,25.125) 119.475,25.125 121.314,23.286 121.314,23.165 C50.1@121.5,22.979
  Bottom Layer w0.2: R31.1@88.35,50.75 R32.2@88.35,49.25 88.35,43.45 87.557,42.657 87.557,37.957 85.7,36.1 85.7,31.2 86.3,30.6 94.883,30.6 95,30.483 95,24.5 97.1,22.4 98.5,22.4 101.225,25.125 v1(119,25.125)
NetC56_1: C56.1 C57.1 R35.2 U10.13 | length 7.6
  Bottom Layer w0.3: C56.1@8,58.521 C57.1@9.5,58.521 ; U10.13@8.2,55.325 9.075,55.325 9.5,55.75 C57.1@9.5,58.521 ; R35.2@11.1,59 11.1,58.979 10.85,58.729 9.686,58.729 9.5,58.543 C57.1@9.5,58.521
NetC58_1: C58.1 U11.6 | length 2.3
  Bottom Layer w0.3: U11.6@31.401,80.95 31.401,82.401 32,83 C58.1@32.021,83
NetC58_2: C58.2 L6.1 U11.5 | length 4
  Bottom Layer w0.3: U11.5@31.401,80 31.601,80.2 32.2,80.2 32.492,80.492 32.492,81.992 32.89,82.39 32.89,82.911 C58.2@32.979,83
NetF1_2: F1.2 L2.1
NetF3_2: F3.2 J8.1 | length 10.2
  Bottom Layer w1.5: v2(73.5,12.05) F3.2@73.5,22.2
NetF4_2: F4.2 J9.1 | length 10.2
  Bottom Layer w1.5: v2(91.5,12.05) F4.2@91.5,22.2
NetF5_1: F5.1 J7.1 | length 6.4
  Top Layer w1: J7.1@60.25,65.525 62.5,63.275 F5.1@62.5,60.1
NetL3_2: L3.2 L4.1 R20.1 | length 4.4
  Top Layer w0.5: v1(55,69.23) 56.88,69.23 57.275,69.625 57.275,69.7 57.425,69.85 R20.1@57.5,69.85
  Bottom Layer w0.5: v1(55,69.23) L4.1@55,70.865
NetQ1_5-6-7-8: Q1.5-6-7-8 Q3.5-6-7-8 XF1.3 XF1.4
NetQ5_1: Q5.1 R28.2 R30.2 | length 52
  Layer 1 w0.2: v1(88.75,42) 89.948,43.198 111.052,43.198 114,40.25 v1(115.5,40.25)
  Bottom Layer w0.2: v1(115.5,40.25) 115,40.75 115,41.207 115.793,42 130.5,42 130.952,41.548 130.952,38.202 Q5.1@130.4,37.65 ; R30.2@130.4,36 Q5.1@130.4,37.65 ; Q5.1@130.4,37.55 Q5.1@130.4,37.65
NetQ5_3: Q5.3 R26.1 R41.1 | length 3.1
  Bottom Layer w0.3: R41.1@129.15,40.75 129.15,40.675 129.55,40.275 129.55,39.65 Q5.3@129.75,39.45 129.95,39.65 129.95,40.275 130.35,40.675 R26.1@130.35,40.75
NetR1_1: R1.1 R2_5V_REG_1.2 R38.1 | length 3.8
  Top Layer w0.2: R38.1@101,19.25 R1.1@103,19.25 102.85,19.4 R2_5V_REG_1.2@102.85,21
NetR3_5V_REG_0_1: R3_5V_REG_0.1 U1_5V_REG_0.5 | length 3.4
  Top Layer w0.254: R3_5V_REG_0.1@101.15,42 101.15,42.075 101.77,42.695 U1_5V_REG_0.5@101.77,45.15
NetR3_5V_REG_1_1: R3_5V_REG_1.1 U1_5V_REG_1.5 | length 3.4
  Top Layer w0.254: R3_5V_REG_1.1@101.15,21 101.15,21.075 101.77,21.695 U1_5V_REG_1.5@101.77,24.15
NetR4_5V_REG_0_1: R4_5V_REG_0.1 R5_5V_REG_0.2 U10.7 | length 50.8
  Top Layer w0.2: v1(15.5,53.5) 15.948,53.052 16.348,53.052 24.195,45.205 59.07,45.205 59.425,44.85 R4_5V_REG_0.1@59.5,44.85 R5_5V_REG_0.2@59.5,43.4
  Bottom Layer w0.2: U10.7@13.8,53.375 15.294,53.375 15.419,53.5 v1(15.5,53.5)
NetR4_5V_REG_1_1: R4_5V_REG_1.1 R5_5V_REG_1.2 U10.10 | length 69.4
  Top Layer w0.2: v1(15.5,52) 16.547,52 23.945,44.602 53.722,44.602 56.75,41.573 56.75,38.75 v1(57.25,38.25) ; v1(57.25,30) 57.328,30 57.678,30.35 R4_5V_REG_1.1@59.5,30.35 R5_5V_REG_1.2@59.5,28.9
  Bottom Layer w0.2: U10.10@8.2,53.375 11.752,53.375 13.125,52.002 14.675,52.002 14.677,52 v1@15.483,52 ; v1(57.25,30) 56.806,30.444 56.806,37.806 v1(57.25,38.25)
NetR8_2: R8.2 U3.26 | length 3.2
  Bottom Layer w0.2: U3.26@48.875,71.25 49.45,71.25 49.648,71.052 50.423,71.052 50.975,70.5 R8.2@51.75,70.5
NetR9_2: R9.2 U3.28 | length 4
  Bottom Layer w0.2: U3.28@48.875,70.25 49.127,70.25 49.151,70.227 49.151,69.974 51.125,68 R9.2@51.75,68
NetR11_2: R11.2 U3.27 | length 3.5
  Bottom Layer w0.2: U3.27@48.875,70.75 50.25,70.75 R11.2@51.75,69.25
NetR12_2: R12.2 U3.29 | length 4.7
  Bottom Layer w0.2: U3.29@48.25,69.625 48.875,69.625 R12.2@51.75,66.75
NetR27_1: R27.1 R29.2 U10.4 | length 24.4
  Bottom Layer w0.2: U10.4@13.8,55.325 13.824,55.349 14.573,55.349 20.424,61.201 26.272,67.048 26.272,71.15 26.722,71.6 26.95,71.6 R29.2@27.25,71.9 R27.1@27.25,73.6
NetR32_1: R32.1 U8.9 | length 4.4
  Bottom Layer w0.3: R32.1@89.65,49.25 89.65,49.175 89.9,48.925 89.975,48.925 90.4,48.5 92,48.5 92.5,48 U8.9@92.5,47.043
NetR36_1: R36.1 R37.2 U10.5 | length 26.2
  Bottom Layer w0.2: U10.5@13.8,54.675 14.325,54.675 26.573,66.923 26.573,69.823 26.573,71.025 26.847,71.298 28.073,71.298 28.675,71.9 R37.2@28.75,71.9 R36.1@28.75,73.6
NetU2_5V_REG_0_6: U2_5V_REG_0.6
NetU2_5V_REG_0_7: U2_5V_REG_0.7 U10.6 | length 54.9
  Top Layer w0.2: v1(15,54.25) 15.577,54.25 24.32,45.506 61.979,45.506 63.635,43.85 U2_5V_REG_0.7@63.635,43.184
  Bottom Layer w0.2: U10.6@13.8,54.025 14.744,54.025 14.969,54.25 v1(15,54.25)
NetU2_5V_REG_1_6: U2_5V_REG_1.6
NetU2_5V_REG_1_7: U2_5V_REG_1.7 U10.8 | length 67
  Top Layer w0.2: v1(15,52.75) 16.223,52.75 24.07,44.903 53.847,44.903 57.1,41.65 57.1,39.231 57.25,39.081 v1(57.25,39) ; v1(57.306,30.75) 58.75,30.75 58.952,30.952 62.033,30.952 63.635,29.35 U2_5V_REG_1.7@63.635,28.684
  Bottom Layer w0.2: U10.8@13.8,52.725 13.812,52.737 14.987,52.737 v1(15,52.75) ; v1(57.25,39) 57.75,38.5 57.75,38.043 57.25,37.543 57.25,30.806 v1(57.306,30.75)
NetU7_6: U7.6
NetU7_7: U7.7 U10.9 | length 146.5
  Top Layer w0.2: v1(15,51.25) 16.87,51.25 23.82,44.3 53.597,44.3 56.448,41.449 56.448,38.344 58.091,36.702 82.431,36.702 82.548,36.819 82.548,40.248 83.3,41 88.661,41 90.161,42.5 95.542,42.5 97.042,41 v1(115.5,41) ; v1(127,40) 127,33.367 127.117,33.25 131.855,33.25 132.49,33.885 U7.7@133.416,33.885
  Layer 2 w0.2: v1(115.5,41) 126.75,41 127,40.75 v1(127,40)
  Bottom Layer w0.2: U10.9@8.2,52.725 11.975,52.725 13,51.7 14.55,51.7 v1(15,51.25)
NetU10_11: U10.11
PoC_A: C17.2 D2.1 D2.10 J1.1 L4.2 | length 18.9
  Bottom Layer w0.199: C17.2@52.729,72.25 54.885,72.25 cw(c54.885,72.135) L4.2@55,72.135 56.635,72.135 ccw(c56.635,73) 57.5,73 57.5,76.917 cw(c59.582,76.917) D2.10@59.582,79 D2.1@60.417,79 J1.1@66,79
PoC_PWR: C2_5V_REG_0.2 C2_5V_REG_1.2 C3_5V_REG_0.2 C3_5V_REG_1.2 C4_5V_REG_0.2 C4_5V_REG_1.2 C5_5V_REG_0.2 C5_5V_REG_1.2 C59.2 F1.1 J4.7 J4.8 J5.7 J5.8 R27.2 U1_5V_REG_0.2 U1_5V_REG_1.2 U7.3 U7.4 U11.2 U11.3 | length 87.1
  Top Layer w1: v2(36.5,79.174) 41.7,79.174 42.2,79.674 v2(42.2,80.5)
  Layer 1 w1.5: v2(42.2,80.5) 47,80.5 59.5,68 76.75,68 82.75,62 96.5,62 97.5,62 99,62
  Bottom Layer w0.2: R27.2@27.25,74.9 27.325,74.9 27.927,74.298 37.5,74.298 37.677,74.475 37.677,75.973 36.5,77.149 v2(36.5,79.174)
  other v1: 98.25,23 97.75,23.5 98.25,24 97.75,24.5 98.25,25 97.75,25.5 97.5,26.5 98.5,26.5 99.5,26.5 100.5,26.5 101.5,26.5 102.5,26.5 103.5,26.5 104.5,26.5 105.5,26.5 106.5,26.5 107.5,26.5 108.5,26.5 109.5,26.5 110.5,26.5 111.5,26.5 112.5,26.5 113.5,26.5 114.5,26.5 115.5,26.5 116.5,26.5 117.5,26.5 118.5,26.5 119.5,26.5 120.5,26.5 121.5,26.5 122.5,26.5 123.5,26.5 124.5,26.5 125.5,26.5 126.5,26.5 127.5,26.5 128.5,26.5 129.5,26.5 130.5,26.5 97.5,27.5 98.5,27.5 99.5,27.5 100.5,27.5 101.5,27.5 102.5,27.5 103.5,27.5 104.5,27.5 105.5,27.5 106.5,27.5 107.5,27.5 108.5,27.5 109.5,27.5 110.5,27.5 111.5,27.5 112.5,27.5 113.5,27.5 114.5,27.5 115.5,27.5 116.5,27.5 117.5,27.5 118.5,27.5 119.5,27.5 120.5,27.5 121.5,27.5 122.5,27.5 123.5,27.5 124.5,27.5 125.5,27.5 126.5,27.5 127.5,27.5 128.5,27.5 129.5,27.5 130.5,27.5 97.5,28.5 98.5,28.5 99.5,28.5 100.5,28.5 101.5,28.5 102.5,28.5 103.5,28.5 104.5,28.5 105.5,28.5 106.5,28.5 107.5,28.5 108.5,28.5 109.5,28.5 110.5,28.5 111.5,28.5 112.5,28.5 113.5,28.5 114.5,28.5 115.5,28.5 116.5,28.5 117.5,28.5 118.5,28.5 119.5,28.5 120.5,28.5 121.5,28.5 122.5,28.5 123.5,28.5 124.5,28.5 125.5,28.5 126.5,28.5 127.5,28.5 128.5,28.5 129.5,28.5 130.5,28.5 106.5,29.5 107.5,29.5 108.5,29.5 109.5,29.5 110.5,29.5 111.5,29.5 112.5,29.5 113.5,29.5 114.5,29.5 115.5,29.5 116.5,29.5 117.5,29.5 118.5,29.5 119.5,29.5 120.5,29.5 121.5,29.5 122.5,29.5 123.5,29.5 124.5,29.5 125.5,29.5 126.5,29.5 127.5,29.5 128.5,29.5 129.5,29.5 130.5,29.5 106.5,30.5 107.5,30.5 108.5,30.5 109.5,30.5 110.5,30.5 111.5,30.5 112.5,30.5 113.5,30.5 114.5,30.5 115.5,30.5 116.5,30.5 117.5,30.5 118.5,30.5 119.5,30.5 120.5,30.5 121.5,30.5 122.5,30.5 123.5,30.5 124.5,30.5 125.5,30.5 126.5,30.5 127.5,30.5 128.5,30.5 129.5,30.5 130.5,30.5 106.5,31.5 107.5,31.5 108.5,31.5 109.5,31.5 110.5,31.5 111.5,31.5 112.5,31.5 113.5,31.5 114.5,31.5 115.5,31.5 116.5,31.5 117.5,31.5 118.5,31.5 119.5,31.5 120.5,31.5 121.5,31.5 122.5,31.5 123.5,31.5 124.5,31.5 125.5,31.5 126.5,31.5 127.5,31.5 128.5,31.5 129.5,31.5 130.5,31.5 106.5,32.5 107.5,32.5 108.5,32.5 109.5,32.5 110.5,32.5 111.5,32.5 112.5,32.5 113.5,32.5 114.5,32.5 115.5,32.5 116.5,32.5 117.5,32.5 118.5,32.5 119.5,32.5 120.5,32.5 121.5,32.5 122.5,32.5 123.5,32.5 124.5,32.5 125.5,32.5 126.5,32.5 127.5,32.5 128.5,32.5 129.5,32.5 130.5,32.5 106.5,33.5 107.5,33.5 108.5,33.5 109.5,33.5 110.5,33.5 111.5,33.5 112.5,33.5 113.5,33.5 114.5,33.5 115.5,33.5 116.5,33.5 117.5,33.5 118.5,33.5 119.5,33.5 120.5,33.5 121.5,33.5 122.5,33.5 123.5,33.5 124.5,33.5 125.5,33.5 126.5,33.5 116.5,34.5 117.5,34.5 118.5,34.5 119.5,34.5 120.5,34.5 121.5,34.5 122.5,34.5 123.5,34.5 124.5,34.5 125.5,34.5 126.5,34.504 116.5,35.5 117.5,35.5 118.5,35.5 119.5,35.5 120.5,35.5 121.5,35.5 122.5,35.5 123.5,35.5 124.5,35.5 125.5,35.5 126.5,35.5 116.5,36.5 117.5,36.5 118.5,36.5 119.5,36.5 120.5,36.5 121.5,36.5 122.5,36.5 123.5,36.5 124.5,36.5 125.5,36.5 126.5,36.5 116.5,37.5 117.5,37.5 118.5,37.5 119.5,37.5 120.5,37.5 121.5,37.5 122.5,37.5 123.5,37.5 124.5,37.5 125.5,37.5 126.5,37.5 116.5,38.5 117.5,38.5 118.5,38.5 119.5,38.5 120.5,38.5 121.5,38.5 122.5,38.5 123.5,38.5 124.5,38.5 125.5,38.5 126.5,38.5 116.5,39.5 117.5,39.5 118.5,39.5 119.5,39.5 120.5,39.5 121.5,39.5 122.5,39.5 123.5,39.5 124.5,39.5 125.5,39.5 126.5,39.5 116.5,40.5 117.5,40.5 118.5,40.5 119.5,40.5 120.5,40.5 121.5,40.5 122.5,40.5 123.5,40.5 124.5,40.5 125.5,40.5 126.5,40.5 116.5,41.5 117.5,41.5 118.5,41.5 119.5,41.5 120.5,41.5 121.5,41.5 122.5,41.5 123.5,41.5 124.5,41.5 125.5,41.5 126.5,41.5 116.5,42.5 117.5,42.5 118.5,42.5 119.5,42.5 120.5,42.5 121.5,42.5 122.5,42.5 123.5,42.5 124.5,42.5 125.5,42.5 126.5,42.5 116.5,43.9 117.5,43.9 118.5,43.9 119.5,43.9 120.5,43.9 121.5,43.9 122.5,43.9 123.5,43.9 124.5,43.9 125.5,43.9 126.5,43.9 98.25,44 97.75,44.5 116.5,44.5 117.5,44.5 118.5,44.5 119.5,44.5 120.5,44.5 121.5,44.5 122.5,44.5 123.5,44.5 124.5,44.5 125.5,44.5 126.5,44.5 98.25,45 97.75,45.5 116.5,45.5 117.5,45.5 118.5,45.5 119.5,45.5 120.5,45.5 121.5,45.5 122.5,45.5 123.5,45.5 124.5,45.5 125.5,45.5 126.5,45.5 98.25,46 97.75,46.5 116.5,46.5 117.5,46.5 118.5,46.5 119.5,46.5 120.5,46.5 121.5,46.5 122.5,46.5 123.5,46.5 124.5,46.5 125.5,46.5 126.5,46.5 97.5,47.5 98.5,47.5 99.5,47.5 100.5,47.5 101.5,47.5 102.5,47.5 103.5,47.5 104.5,47.5 105.5,47.5 106.5,47.5 107.5,47.5 108.5,47.5 109.5,47.5 110.5,47.5 111.5,47.5 112.5,47.5 113.5,47.5 114.5,47.5 115.5,47.5 116.5,47.5 117.5,47.5 118.5,47.5 119.5,47.5 120.5,47.5 121.5,47.5 122.5,47.5 123.5,47.5 124.5,47.5 125.5,47.5 126.5,47.5 97.5,48.5 98.5,48.5 99.5,48.5 100.5,48.5 101.5,48.5 102.5,48.5 103.5,48.5 104.5,48.5 105.5,48.5 106.5,48.5 107.5,48.5 108.5,48.5 109.5,48.5 110.5,48.5 111.5,48.5 112.5,48.5 113.5,48.5 114.5,48.5 115.5,48.5 116.5,48.5 117.5,48.5 118.5,48.5 119.5,48.5 120.5,48.5 121.5,48.5 122.5,48.5 123.5,48.5 124.5,48.5 125.5,48.5 126.5,48.5 97.5,49.5 98.5,49.5 99.5,49.5 100.5,49.5 101.5,49.5 102.5,49.5 103.5,49.5 104.5,49.5 105.5,49.5 106.5,49.5 107.5,49.5 108.5,49.5 109.5,49.5 110.5,49.5 111.5,49.5 112.5,49.5 113.5,49.5 114.5,49.5 115.5,49.5 116.5,49.5 117.5,49.5 118.5,49.5 119.5,49.5 120.5,49.5 121.5,49.5 122.5,49.5 123.5,49.5 124.5,49.5 125.5,49.5 126.5,49.5 106.5,50.5 107.5,50.5 108.5,50.5 109.5,50.5 110.5,50.5 111.5,50.5 112.5,50.5 113.5,50.5 114.5,50.5 115.5,50.5 116.5,50.5 117.5,50.5 118.5,50.5 119.5,50.5 120.5,50.5 121.5,50.5 122.5,50.5 123.5,50.5 124.5,50.5 125.5,50.5 126.5,50.5 106.5,51.5 107.5,51.5 108.5,51.5 109.5,51.5 110.5,51.5 111.5,51.5 112.5,51.5 113.5,51.5 114.5,51.5 115.5,51.5 116.5,51.5 117.5,51.5 118.5,51.5 119.5,51.5 120.5,51.5 121.5,51.5 122.5,51.5 123.5,51.5 124.5,51.5 125.5,51.5 126.5,51.5 106.5,52.5 107.5,52.5 108.5,52.5 109.5,52.5 110.5,52.5 111.5,52.5 112.5,52.5 113.5,52.5 114.5,52.5 115.5,52.5 116.5,52.5 117.5,52.5 118.5,52.5 119.5,52.5 120.5,52.5 121.5,52.5 122.5,52.5 123.5,52.5 124.5,52.5 125.5,52.5 126.5,52.5 106.5,53.5 107.5,53.5 108.5,53.5 109.5,53.5 110.5,53.5 111.5,53.5 112.5,53.5 113.5,53.5 114.5,53.5 115.5,53.5 116.5,53.5 117.5,53.5 118.5,53.5 119.5,53.5 120.5,53.5 121.5,53.5 122.5,53.5 123.5,53.5 124.5,53.5 125.5,53.5 126.5,53.5 106.5,54.5 107.5,54.5 108.5,54.5 109.5,54.5 110.5,54.5 111.5,54.5 112.5,54.5 113.5,54.5 114.5,54.5 115.5,54.5 116.5,54.5 117.5,54.5 118.5,54.5 119.5,54.5 120.5,54.5 121.5,54.5 122.5,54.5 123.5,54.5 124.5,54.5 125.5,54.5 126.5,54.5 116.5,55.5 117.5,55.5 118.5,55.5 119.5,55.5 120.5,55.5 121.5,55.5 122.5,55.5 123.5,55.5 124.5,55.5 125.5,55.5 126.5,55.5 116.5,56.5 117.5,56.5 118.5,56.5 119.5,56.5 120.5,56.5 121.5,56.5 122.5,56.5 123.5,56.5 124.5,56.5 125.5,56.5 126.5,56.5 116.5,57.5 117.5,57.5 118.5,57.5 119.5,57.5 120.5,57.5 121.5,57.5 122.5,57.5 123.5,57.5 124.5,57.5 125.5,57.5 126.5,57.5 116.5,58.5 117.5,58.5 118.5,58.5 119.5,58.5 120.5,58.5 121.5,58.5 122.5,58.5 123.5,58.5 124.5,58.5 125.5,58.5 126.5,58.5 116.5,59.5 117.5,59.5 118.5,59.5 119.5,59.5 120.5,59.5 121.5,59.5 122.5,59.5 123.5,59.5 124.5,59.5 125.5,59.5 126.5,59.5 116.5,60.5 117.5,60.5 118.5,60.5 119.5,60.5 120.5,60.5 121.5,60.5 122.5,60.5 123.5,60.5 124.5,60.5 125.5,60.5 126.5,60.5 96.5,61.5 97.5,61.5 98.5,61.5 99.5,61.5 100.5,61.5 101.5,61.5 102.5,61.5 103.5,61.5 104.5,61.5 105.5,61.5 106.5,61.5 107.5,61.5 108.5,61.5 109.5,61.5 110.5,61.5 111.5,61.5 112.5,61.5 113.5,61.5 114.5,61.5 115.5,61.5 116.5,61.5 117.5,61.5 118.5,61.5 119.5,61.5 120.5,61.5 121.5,61.5 122.5,61.5 123.5,61.5 124.5,61.5 125.5,61.5 126.5,61.5 96.5,62.5 97.5,62.5 98.5,62.5 99.5,62.5 100.5,62.5 101.5,62.5 102.5,62.5 103.5,62.5 104.5,62.5 105.5,62.5 106.5,62.5 107.5,62.5 108.5,62.5 109.5,62.5 110.5,62.5 111.5,62.5 112.5,62.5 113.5,62.5 114.5,62.5 115.5,62.5 116.5,62.5 117.5,62.5 118.5,62.5 119.5,62.5 120.5,62.5 121.5,62.5 122.5,62.5 123.5,62.5 124.5,62.5 125.5,62.5 126.5,62.5 102.5,63.5 103.5,63.5 104.5,63.5 105.5,63.5 106.5,63.5 107.5,63.5 108.5,63.5 109.5,63.5 110.5,63.5 111.5,63.5 112.5,63.5 113.5,63.5 114.5,63.5 115.5,63.5 116.5,63.5 117.5,63.5 118.5,63.5 119.5,63.5 120.5,63.5 121.5,63.5 122.5,63.5 123.5,63.5 124.5,63.5 125.5,63.5 126.5,63.5 119.5,64.5 121.5,64.5 123.5,64.5 124.5,64.5 125.5,64.5 126.5,64.5 121.5,65.5 124.5,65.5 125.5,65.5 126.5,65.5 119.5,66.5 121.5,66.5 123.5,66.5 124.5,66.5 125.5,66.5 126.5,66.5
PRE_CAN_N: L5.3 U8.12 | length 5.1
  Bottom Layer w0.3: L5.3@92.375,51.45 93.552,50.273 93.552,49.054 94.049,48.557 94.049,47.429 94,47.38 U8.12@94,47.043
PRE_CAN_P: L5.2 U8.13 | length 5.1
  Bottom Layer w0.3: U8.13@94.5,47.043 94.5,47.38 94.451,47.429 94.451,48.724 93.954,49.221 93.954,50.904 94.257,51.207 94.32,51.207 94.563,51.45 L5.2@94.75,51.45
PRE_SHUNT: Q2.5-6-7-8 Q4.5-6-7-8 U7.1 U7.2
PRE_VCC: D3.1 D4.2 Q1.1 Q1.2 Q1.3 Q2.1 Q2.2 Q2.3 Q3.1 Q3.2 Q3.3 Q4.1 Q4.2 Q4.3 R26.2 | length 45.2
  Bottom Layer w0.2: R26.2@131.65,40.75 D3.1@133.21,40.75
  Bottom Layer w0.5: D4.2@95.325,49.25 95.527,49.25 95.648,49.129 95.648,48.927 96.75,47.825 96.75,44.25 97.75,43.25 130.71,43.25 133.21,40.75 v1(133.25,40.75)
PWR_MOSFET: Q2.4 Q4.4 R41.2 | length 5.5
  Top Layer w0.2: v1(127.5,40.75) 127.557,40.693 127.557,40.453 128.025,39.985 128.025,39.835 128.402,39.458 131.648,39.458 132.025,39.835 Q2.4@132.025,39.91
RAW_PWR: J3.16 J3.17 XF1.1 XF1.2
REG_EN_5V_REG_0: R2_5V_REG_0.1 U1_5V_REG_0.7 | length 3.2
  Top Layer w0.254: R2_5V_REG_0.1@104.15,42 104.15,44.99 U1_5V_REG_0.7@104.31,45.15
REG_EN_5V_REG_1: R2_5V_REG_1.1 U1_5V_REG_1.7 | length 3.2
  Top Layer w0.254: R2_5V_REG_1.1@104.15,21 104.15,23.99 U1_5V_REG_1.7@104.31,24.15
RL+: J3.5 J5.4 | length 20.8
  Top Layer w1.5: J5.4@89.75,65.525 91.525,63.75 100.5,63.75 102.5,65.75 102.5,70.1 J3.5@104,71.6
RL-: J3.6 J5.3 | length 15.3
  Top Layer w1.5: J5.3@87.25,65.525 88.975,67.25 95.65,67.25 J3.6@100,71.6
RP_MOS_LINK: D3.2 Q1.4 Q3.4 R25.2 | length 11.5
  Top Layer w0.2: Q3.4@129.975,41.665 130.352,42.042 133.598,42.042 133.975,41.665 133.975,41.533 134.05,41.458 134.292,41.458 v1(135,40.75)
  Bottom Layer w0.2: R25.2@133.25,45.6 D3.2@133.25,44.135 133.405,44.135 133.76,43.78 133.76,43.625 135,42.385 v1(135,40.75)
RPI_3V3: C37.2 C38.2 J2.15 R6.2 R7.2 U3.24 | length 93.5
  Top Layer w0.3: C37.2@48.5,71.457 C38.2@50,71.457 ; J2.15@61.5,5.5 66.5,5.5 67,6 v1(67,10)
  Layer 1 w0.3: v1(50,71.9) 51.725,70.175 51.725,68 53.475,66.25 56.5,66.25 56.75,66.5 v1(56.75,67)
  Bottom Layer w0.3: U3.24@48.875,72.25 49.65,72.25 v1(50,71.9) ; v1(56.75,67) 56.455,66.705 56.455,11.045 57.4,10.1 64.15,10.1 ; R6.2@65.15,9 65.15,7.6 R7.2@65.25,7.5 ; R6.2@65.187,9.038 64.9,9.325 64.9,9.35 64.15,10.1 ; v1(67,10) 66.946,10 66.846,10.1 64.15,10.1
RPI_GPS_RX: D7.1 P1.10 R40.1 | length 7.4
  Bottom Layer w0.2: P1.10@2.23,18.53 3.36,17.4 6.825,17.4 7.35,17.925 7.34,17.935 D7.1@7.34,19.5
RPI_GPS_TX: D6.1 P1.8 R39.1 | length 7.4
  Bottom Layer w0.2: P1.8@2.23,15.99 3.338,17.098 6.827,17.098 7.35,16.575 R39.1@7.35,16.5 7.34,16.49 D6.1@7.34,15
RPI_USB0_D_N: J8.2 pad.31@42,40 | length 76.7
  Top Layer w0.184: pad.31@42,40 43.725,40 43.833,40.108 43.833,41.817 45.126,43.11 46.874,43.11 47.192,42.792 47.984,42.792 48.192,43 v1(48.25,43) ; J8.2@76,13.65 76,12.715 76.508,12.207 76.725,12.207 76.833,12.099 76.833,11.766 76.625,11.558 v1(76.625,11.5)
  Bottom Layer w0.184: v1(48.25,43) 48.308,43 48.516,42.792 48.914,42.792 51.562,40.144 51.562,40.019 54.25,37.331 54.25,9.25 58.5,5 73,5 76.833,8.833 76.833,11.234 76.625,11.442 v1(76.625,11.5)
RPI_USB0_D_P: J8.3 pad.31@46,40 | length 76.7
  Top Layer w0.184: pad.31@46,40 44.275,40 44.167,40.108 44.167,41.678 45.264,42.776 46.736,42.776 47.053,42.458 47.984,42.458 48.192,42.25 v1(48.25,42.25) ; v1(77.375,11.5) 77.375,11.558 77.167,11.766 77.167,12.099 77.275,12.207 77.492,12.207 78,12.715 J8.3@78,13.65
  Bottom Layer w0.184: v1(48.25,42.25) 48.308,42.25 48.516,42.458 48.776,42.458 51.228,40.006 51.228,39.881 53.916,37.193 53.916,9.112 58.362,4.666 73.138,4.666 77.167,8.695 77.167,11.234 77.375,11.442 v1(77.375,11.5)
RPI_USB1_D_N: J9.2 pad.31@30,40 | length 109.2
  Top Layer w0.184: pad.31@30,40 31.725,40 31.833,40.108 31.833,41.817 33.126,43.11 34.874,43.11 35.15,42.834 35.748,42.834 35.914,43 v1(36,43) ; J9.2@94,13.65 94,12.715 94.508,12.207 94.725,12.207 94.833,12.099 94.833,11.766 94.625,11.558 v1(94.625,11.5)
  Bottom Layer w0.184: v1(36,43) 36.086,43 36.406,42.679 36.652,42.679 37.5,41.831 37.5,14 42.916,8.584 52.666,8.584 58.25,3 91,3 94.833,6.833 94.833,11.234 94.625,11.442 v1(94.625,11.5)
RPI_USB1_D_P: J9.3 pad.31@34,40 | length 109.1
  Top Layer w0.184: pad.31@34,40 32.275,40 32.167,40.108 32.167,41.678 33.264,42.776 34.736,42.776 35.011,42.5 35.712,42.5 35.962,42.25 v1(36,42.25) ; v1(95.375,11.5) 95.375,11.558 95.167,11.766 95.167,12.099 95.275,12.207 95.492,12.207 96,12.715 J9.3@96,13.65
  Bottom Layer w0.184: v1(36,42.25) 36.009,42.241 36.618,42.241 37.166,41.693 37.166,13.862 42.778,8.25 52.528,8.25 58.112,2.666 91.138,2.666 95.167,6.695 95.167,11.234 95.375,11.442 v1(95.375,11.5)
RR+: J3.7 J5.2 | length 13.8
  Top Layer w1.5: J5.2@84.75,65.525 88.225,69 93.4,69 J3.7@96,71.6
RR-: J3.8 J5.1 | length 12.3
  Top Layer w1.5: J5.1@82.25,65.525 87.475,70.75 90.839,70.75 91.689,71.6 J3.8@92,71.6
SIOA_N: C18.1 U3.22 | length 3.3
  Bottom Layer w0.2: U3.22@48.875,73.25 49.239,73.25 49.338,73.151 51.397,73.151 51.514,73.268 51.514,73.514 51.75,73.75 C18.1@51.771,73.75
SIOA_P: C17.1 U3.23 | length 3.3
  Bottom Layer w0.2: U3.23@48.875,72.75 49.239,72.75 49.338,72.849 51.397,72.849 51.514,72.732 51.514,72.486 51.75,72.25 C17.1@51.771,72.25
TERM_CAP: C54.2 R33.1 R34.2 | length 3.2
  Bottom Layer w0.3: R33.1@92.65,57.5 92.65,57.575 92.9,57.825 92.975,57.825 93.5,58.35 ; C54.2@93.5,59.021 93.5,58.35 ; R34.2@94.35,57.5 94.35,57.575 94.1,57.825 94.025,57.825 93.5,58.35
X20_N: C44.1 R24.2 U6.5 Y2.3 | length 10.7
  Bottom Layer w0.2: U6.5@95.816,34.73 96.365,34.73 96.523,34.572 96.523,34.363 96.64,34.246 96.805,34.246 97.274,34.715 97.274,35.542 97.884,36.151 98.258,36.151 98.375,36.268 98.375,36.35 98.75,36.725 C44.1@98.75,38.021 ; R24.2@98.75,36.65 98.825,36.65 99.125,36.35 99.125,36.268 99.242,36.151 100,36.151 100.048,36.198 100.522,36.198 100.527,36.193 101.793,36.193 102.6,37 Y2.3@102.6,37.1
X20_P: C43.1 R24.1 U6.6 Y2.1 | length 9.3
  Bottom Layer w0.2: U6.6@95.816,33.46 96.365,33.46 96.523,33.618 96.523,33.827 96.64,33.944 96.93,33.944 97.576,34.59 97.576,35.417 98.009,35.849 98.258,35.849 98.375,35.732 98.375,35.65 98.675,35.35 R24.1@98.75,35.35 ; C43.1@98.75,33.979 R24.1@98.75,35.35 ; Y2.1@100.9,34.9 100.514,35.286 100.514,35.78 100.397,35.897 100.173,35.897 100.125,35.849 99.242,35.849 99.125,35.732 99.125,35.65 98.825,35.35 R24.1@98.75,35.35
X25_N: C20.2 U3.16 Y1.3 | length 8.6
  Bottom Layer w0.2: U3.16@48.875,76.25 49.239,76.25 49.338,76.349 51.222,76.349 51.362,76.209 53.232,76.209 53.526,76.503 53.526,76.897 53.643,77.014 53.785,77.014 C20.2@54.021,77.25 53.785,77.486 53.643,77.486 53.526,77.603 53.526,78.014 53.603,78.092 53.603,78.397 53.72,78.514 54.214,78.514 Y1.3@54.6,78.9
X25_P: C19.2 U3.15 Y1.1 | length 9.5
  Bottom Layer w0.2: U3.15@48.875,76.75 49.239,76.75 49.338,76.651 51.347,76.651 51.487,76.51 53.107,76.51 53.224,76.627 53.224,76.897 53.107,77.014 52.965,77.014 C19.2@52.729,77.25 52.965,77.486 53.107,77.486 53.224,77.603 53.224,78.139 53.302,78.216 53.302,78.522 53.307,78.527 53.307,79.793 52.5,80.6 Y1.1@52.4,80.6
XRES: R10.2 U3.17 | length 2.8
  Bottom Layer w0.2: U3.17@48.875,75.75 51.35,75.75 R10.2@51.6,75.5
pads on no net: D2.2 D2.4 D2.5 D2.6 D2.7 D2.9 J2.12 J3. J8.MH1 J8.MH2 J9.MH1 J9.MH2 P1.1 P1.3 P1.5 P1.16 P1.17 P1.18 P1.22 P1.27 P1.28 P1.29 P1.31 P1.32 P1.33 P1.36 P1.37 U3.1 U3.2 U3.3 U3.5 U3.6 U3.9 U3.10 U3.12 U3.13 U3.14 U3.18 U3.19 U3.33 U3.34 U3.37 U3.38 U3.41 U3.42 U3.43 U3.44 U3.45 U3.46 U3.47 U3.48 U3.49 U3.50 U3.51 U3.52 U3.53 U3.54 U6.3

## Polygon pours and split planes (outlines as drawn)
PRE_SHUNT on Top Layer "PRE_SHUNT_L01_P058" (solid, remove dead copper, pour order 58): 131,33.25 131,35.75 135,35.75 135,39.25 127,39.25 127,33.25
PoC_PWR on Top Layer "POC_PWR_L01_P059" (solid, remove dead copper, pour order 59): 96,64.25 96,60.75 116,60.75 116,26 131,26 131,33.25 127,33.25 127,67 119,67 119,64.25
GND on Top Layer "GND_L01_P080" (solid, remove dead copper, pour order 80): 0,3 0,82 cw(c3,82) 3,85 133.5,85 cw(c133.5,82) 136.5,82 136.5,3 cw(c133.5,3) 133.5,0 3,0 cw(c3,3)
NetC1_5V_REG_0_2 on Top Layer "NETC1_5V_REG_0_2_L01_P050" (solid, remove dead copper, pour order 50): 97.25,42.5 97.25,50.5 95,50.5 95,52.5 87,52.5 87,42.5
5V_FB_5V_REG_1 on Top Layer "5V_FB_5V_REG_1_L01_P051" (solid, remove dead copper, pour order 51): 63,36 63,31 67.5,31 67.5,24.75 83.5,24.75 83.5,28 87,28 87,31.5 95,31.5 95,40.5 83.25,40.5 83.25,36
5VA on Top Layer "5VA_L01_P053" (solid, remove dead copper, pour order 53): 9,6.25 14,6.25 14,31 63,31 63,36 9,36
5VB on Top Layer "5VB_L01_P054" (solid, remove dead copper, pour order 54): 63,45.5 63,50.5 58.5,50.5 58.5,45.5
NetC41_1 on Top Layer "NETC41_1_L01_P060" (solid, remove dead copper, pour order 60): 51,70.5 51,74.5 58.5,74.5 58.5,70.5
5VA on Top Layer "5VA_L01_P062" (solid, remove dead copper, pour order 62): 0,6.25 0,12.25 14,12.25 14,6.25
PoC_PWR on Top Layer "POC_PWR_L01_P048" (solid, remove dead copper, pour order 48): 106,55 116,55 116,47 98.75,47 98.75,43.5 97.25,43.5 97.25,50.5 106,50.5
5V_FB_5V_REG_0 on Top Layer "5V_FB_5V_REG_0_L01_P052" (solid, remove dead copper, pour order 52): 63,50.5 67.5,50.5 67.5,56 83.25,56 83.25,61.5 95,61.5 95,52.5 87,52.5 87,49 83.5,49 83.5,45.5 63,45.5
PRE_VCC on Top Layer "PRE_VCC_L01_P055" (solid, remove dead copper, pour order 55): 128.5,39.66 128.5,40.16 127.85,40.81 127.85,41.84 129.75,41.84 129.75,41.34 130.25,41.34 130.25,41.84 133.5,41.84 133.5,41.34 134.15,40.69 134.15,39.66 132.25,39.66 132.25,40.16 131.75,40.16 131.75,39.66
NetF1_2 on Top Layer "NETF1_2_L01_P061" (solid, remove dead copper, pour order 61): 47.5,84 58.5,84 58.5,77.5 47.5,77.5
RAW_PWR on Top Layer "RAW_PWR_L01_P056" (solid, remove dead copper, pour order 56): 114,77.5 114,85 136,85 136,60 127,60 127,77.5
NetQ1_5-6-7-8 on Top Layer "NETQ1_5-6-7-8_L01_P057" (solid, remove dead copper, pour order 57): 127,53.5 135,53.5 135,42.25 127,42.25
NetC1_5V_REG_1_2 on Top Layer "NETC1_5V_REG_1_2_L01_P049" (solid, remove dead copper, pour order 49): 97.25,21.5 97.25,29.5 95,29.5 95,31.5 87,31.5 87,21.5
PoC_PWR on Top Layer "POC_PWR_L01_P047" (solid, remove dead copper, pour order 47): 106,34 116,34 116,26 98.75,26 98.75,22.5 97.25,22.5 97.25,29.5 106,29.5
GND on Layer 1 "GND_L02_P083" (solid, remove dead copper, pour order 83): 0,3 0,82 cw(c3,82) 3,85 133.5,85 cw(c133.5,82) 136.5,82 136.5,3 cw(c133.5,3) 133.5,0 3,0 cw(c3,3)
PoC_PWR on Layer 1 "POC_PWR_L02_P070" (solid, remove dead copper, pour order 70): 119,64 96,64 96,61 116,61 116,26 131,26 131,33.25 127,33.25 127,67 119,67
PoC_PWR on Layer 1 "POC_PWR_L02_P072" (solid, remove dead copper, pour order 72): 106,55 116,55 116,47 98.75,47 98.75,43.5 97.25,43.5 97.25,50.5 106,50.5
PoC_PWR on Layer 1 "POC_PWR_L02_P071" (solid, remove dead copper, pour order 71): 106,34 116,34 116,26 98.75,26 98.75,22.5 97.25,22.5 97.25,29.5 106,29.5
NetQ1_5-6-7-8 on Layer 1 "NETQ1_5-6-7-8_L02_P068" (solid, remove dead copper, pour order 68): 127,53.5 135,53.5 135,42.25 127,42.25
RAW_PWR on Layer 1 "RAW_PWR_L02_P067" (solid, remove dead copper, pour order 67): 114,77.5 114,85 136,85 136,60 126,60 126,77.5
PRE_VCC on Layer 1 "PRE_VCC_L02_P066" (solid, remove dead copper, pour order 66): 128.5,39.66 128.5,40.16 127.85,40.81 127.85,41.84 129.75,41.84 129.75,41.34 130.25,41.34 130.25,41.84 133.5,41.84 133.5,41.34 134.15,40.69 134.15,39.66 132.25,39.66 132.25,40.16 131.75,40.16 131.75,39.66
5VA on Layer 1 "5VA_L02_P065" (solid, remove dead copper, pour order 65): 0,6.25 0,12.25 14,12.25 14,6.25
GND on Layer 2 "GND_L03_P082" (solid, remove dead copper, pour order 82): 0,3 0,82 cw(c3,82) 3,85 133.5,85 cw(c133.5,82) 136.5,82 136.5,3 cw(c133.5,3) 133.5,0 3,0 cw(c3,3)
PoC_PWR on Layer 2 "POC_PWR_L03_P074" (solid, remove dead copper, pour order 74): 96,60.75 96,66.75 104,66.75 104,60.75
5VA on Layer 2 "5VA_L03_P064" (solid, remove dead copper, pour order 64): 0,6.25 0,12.25 14,12.25 14,6.25
GND on Bottom Layer "GND_L04_P081" (solid, remove dead copper, pour order 81): 0,3 0,82 cw(c3,82) 3,85 133.5,85 cw(c133.5,82) 136.5,82 136.5,3 cw(c133.5,3) 133.5,0 3,0 cw(c3,3)
NetC58_2 on Bottom Layer "NETC58_2_L04_P076" (solid, remove dead copper, pour order 76): 27.5,78.5 27.5,81.5 30.75,81.5 30.75,80.5 32,80.5 32,79.5 30.75,79.5 30.75,78.5
5VB on Bottom Layer "5VB_L04_P075" (solid, remove dead copper, pour order 75): 57.5,53.5 63.5,53.5 63.5,30.5 95,30.5 95,24.5 57.5,24.5
3V3 on Bottom Layer "3V3_L04_P078" (solid, remove dead copper, pour order 78): 23,78 25.5,78 25.5,76 27.5,76 27.5,81.5 25.25,81.5 25.25,80 23,80
PoC_PWR on Bottom Layer "POC_PWR_L04_P077" (solid, remove dead copper, pour order 77): 33,80.5 33,78.5 37.25,78.5 37.25,80 35.5,80 35.5,80.5
PoC_PWR on Bottom Layer "POC_PWR_L04_P073" (solid, remove dead copper, pour order 73): 96,60.75 96,66.75 104,66.75 104,60.75
5VA on Bottom Layer "5VA_L04_P063" (solid, remove dead copper, pour order 63): 0,6.25 0,12.25 14,12.25 14,6.25

## Silkscreen, mask and mechanical layers (free items; w line width, h text height)
Top Overlay:
  drawing of 12 lines, arcs and shapes, not listed
  text "<- WAKE" at 120.9,24.125 h0.75
  text "<- 5VB_FORCE_ON" at 104.9,18.938 h0.75
Bottom Overlay:
  text "CFG1" at 33.75,75.9 h0.75
  text "CFG0" at 38.375,75.9 h0.75
  text "HU SUPPORT PCB" at 129,13.5 h5
  text "Project:" at 129,9.166 h2
  text "BRZ" at 111.65,8.85 h2
  text "Revision:" at 129,5.5 h2
  text "revA" at 111.65,5.35 h2
  text "Date:" at 129,2 h2
  text "12/05/2025" at 111.65,1.85 h2
Mechanical 1:
  the board outline again, w0.15